# Altium PCB PCB_Микроконтроллер_2_2024-08-19.pcbdoc
Units mil, origin at the board's own origin, x right, y up, seen from the top; angles counter-clockwise.
Board outline 3343.13 x 2610 mil, 2 copper layers (Top Layer, Bottom Layer); 19 components, 17 nets, 81 pads, 8 vias.
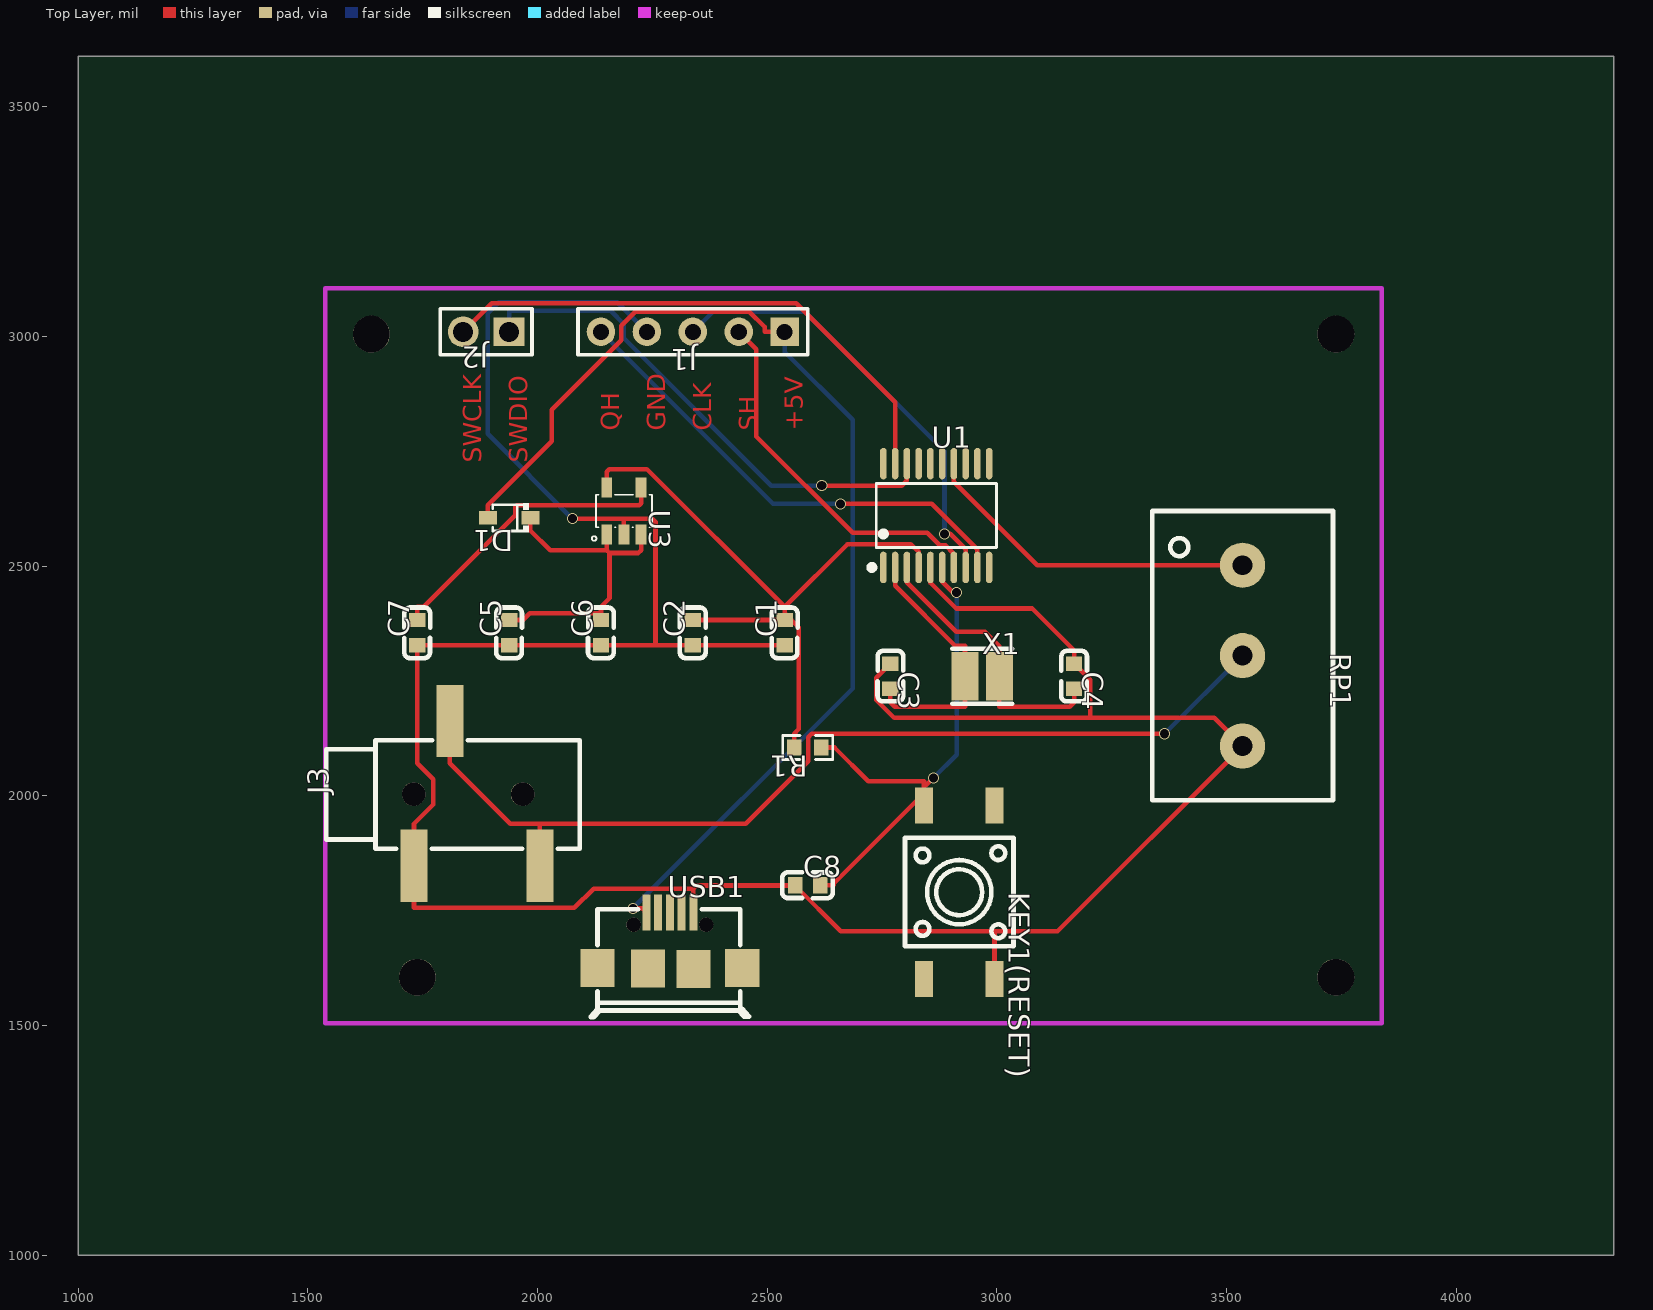
[diagram p0: Top Layer view]
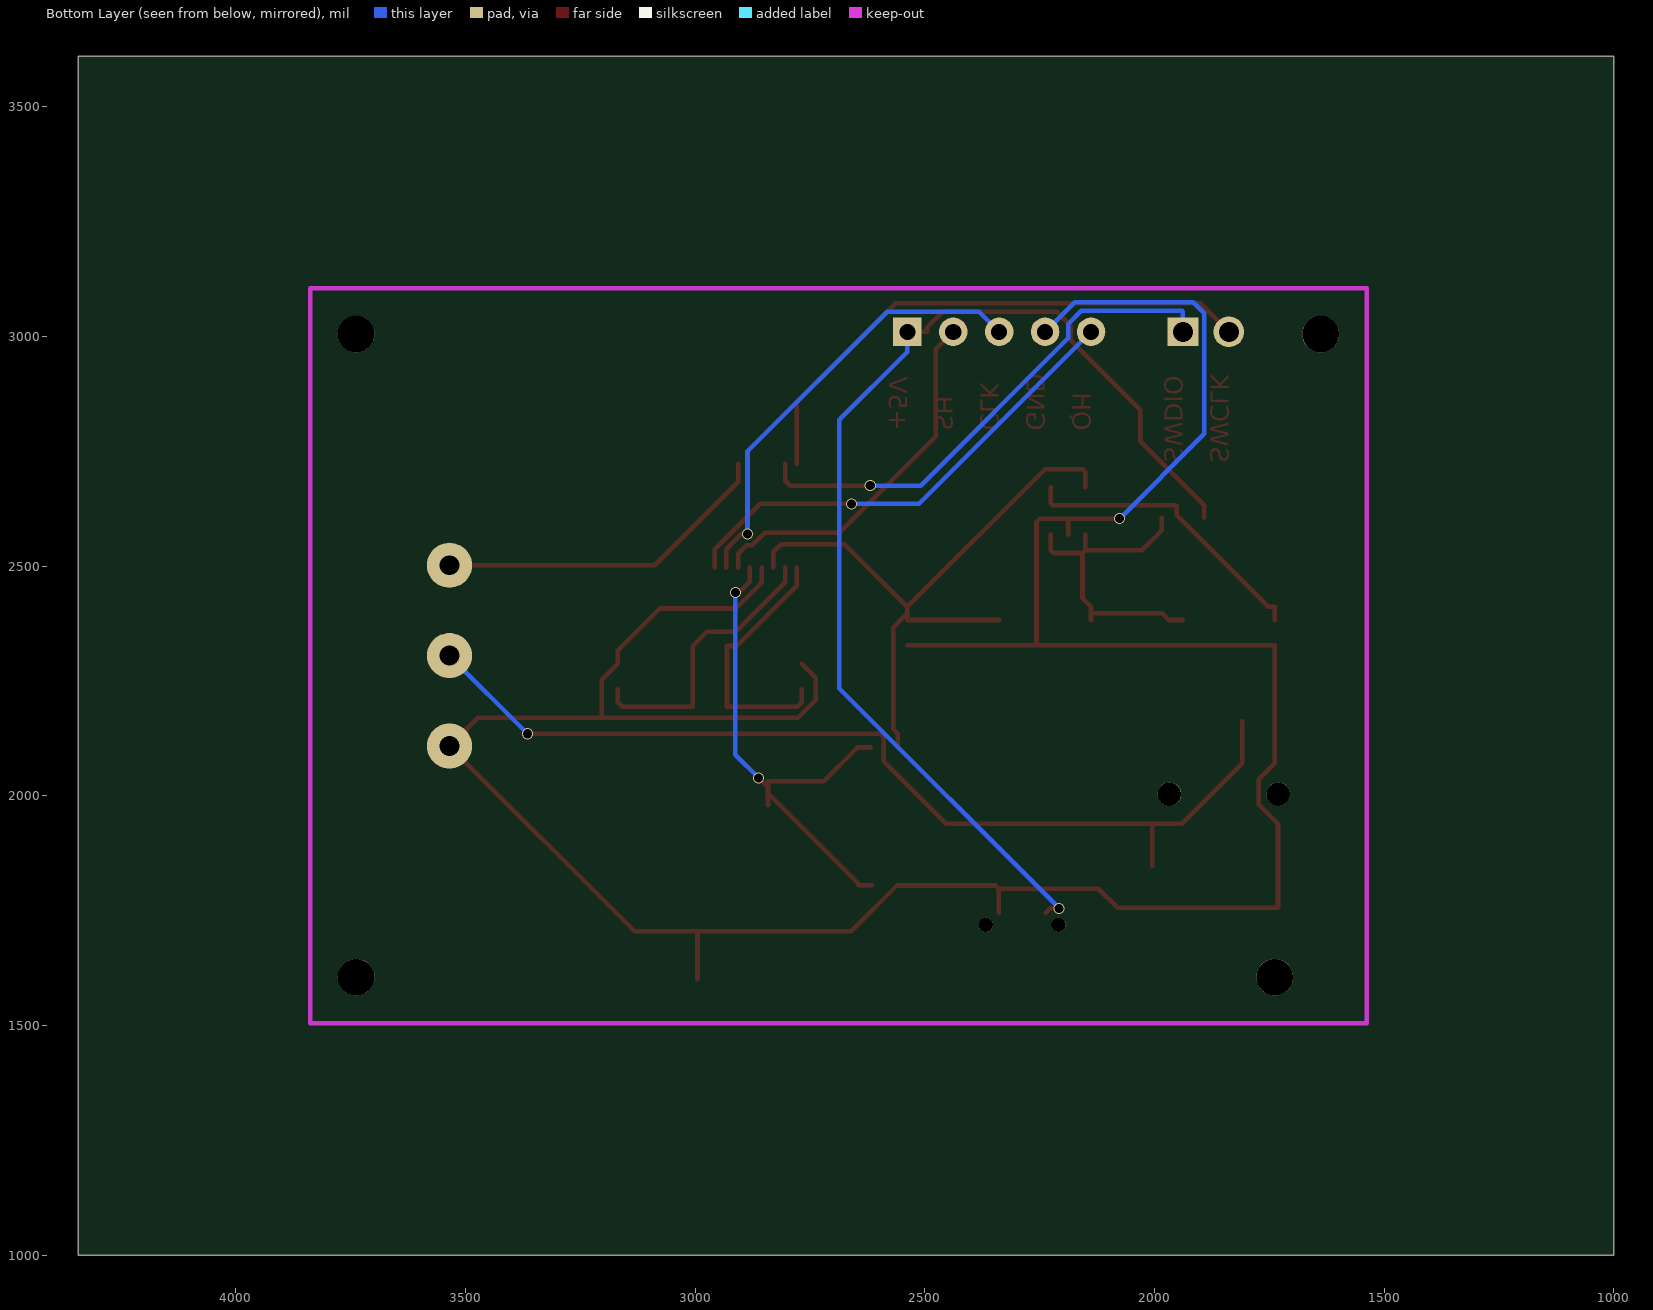
[diagram p1: Bottom Layer view, seen from below]

## Layer stack, top to bottom
Top Layer: signal copper (thickness not stored)
Dielectric: dielectric 12.6, FR-4, Dk 4.8
Bottom Layer: signal copper (thickness not stored)

## Board outline
4343.13,1000 1000,1000 1000,3610 4343.13,3610

## Components (designator, comment, footprint, x,y, rotation, side; value= is the part's Value field where it differs from the comment)
C1 "1uF" C0603 2538.13,2355 r90 top
C2 "100nF" C0603 2338.13,2355 r90 top
C3 "10pF" C0603 2768.13,2260 r270 top
C4 "10pF" C0603 3168.13,2260 r270 top
C5 "1uF" C0603 1938.13,2355 r90 top
C6 "100nF" C0603 2138.13,2355 r90 top
C7 "10nF" C0603 1738.13,2355 r90 top
C8 "0.1u" C0603 2588.13,1805 r0 top
D1 "BAT60JFILM" SOD-323_L1.8-W1.3-LS2.5-RD 1938.13,2605 r180 top
J1 "HDR-M-2.54_1x5" HDR-M-2.54_1X5 2338.13,3010 r180 top
J2 "HDR-M-2.54_1x2" HDR-M-2.54_1X2 1888.13,3010 r180 top
J3 "320B/PJ-001 3.5Jacks" AUDIO-SMD_C3792 1868.13,2005 r90 top
KEY1(RESET) "K4-6×6_SMD" KEY-SMD_4P-L6.0-W6.0-P3.90-LS10.0 2918.13,1790 r270 top
R1 "100k" R0603 2588.13,2105 r180 top
RP1 "POTRES COPY COPY" ПОТЕНЦИОМЕТР 3338.13,1990 r270 top
U1 "STM32G030F6P6" TSSOP-20_L6.5-W4.4-P0.65-LS6.4-BL 2868.13,2610 r0 top
U3 "LD3985M33R" SOT-23-5_L3.0-W1.7-P0.95-LS2.8-BR 2188.13,2620 r270 top
USB1 "MICRO USB B" "GENERIC MICRO USB / MICRO-USB-SMD_MICRO-USB-16" 2288.13,1685 r0 top
X1 "8MHz" OSC-SMD_2P-L3.2-W2.5 2968.13,2260 r0 top

## Footprints (in the part's own frame and the unit in brackets; to place one, negate y for a bottom-side part, rotate by r counter-clockwise, add the part's x,y. Pads: shape width x height; smd on the part's side, far side on the other; paste and mask are expansions set on the pad)
AUDIO-SMD_C3792 [mil]
  rect 157.48x59.05 smd paste+0 mask+2: 1(-157.5,137) 2(-157.5,-137) 3(157.5,59)
  round 51.18 hole 51.18 unplated paste+0: ""(-1.5,137.64) ""(-1.5,-99.37)
  silkscreen extent -121,-224 116,328
C0603 [mm]
  rect 0.8x0.9 smd paste+0 mask+0.051: 1(-0.7,0) 2(0.7,0)
  silkscreen extent -1.41,-0.71 1.39,0.72
"GENERIC MICRO USB / MICRO-USB-SMD_MICRO-USB-16" [mm]
  rect 0.45x2 smd paste+0 mask+0.051: 1(-1.301,1.535) 2(-0.65,1.535) 3(0,1.535) 4(0.65,1.535) 5(1.3,1.535)
  rect 1.9x2.1 smd paste+0 mask+0.051: 6(-4,-1.535) 6(-1.21,-1.55) 6(1.31,-1.57) 6(4,-1.535)
  round 0.8 hole 0.8 unplated paste+0: ""(-2,0.864) ""(2,0.864)
  silkscreen extent -4.37,-4.26 4.38,1.72
HDR-M-2.54_1X2 [mm]
  rect 1.7x1.575 hole 1.1 paste+0 mask+0.051: 1(-1.27,0)
  round 1.7 hole 1.1 paste+0 mask+0.051: 2(1.27,0)
  silkscreen extent -2.54,-1.27 2.54,1.27
HDR-M-2.54_1X5 [mil]
  rect 62x62 hole 35 paste+0 mask+2: 1(-200,0)
  round 62 hole 35 paste+0 mask+2: 2(-100,0) 3(0,0) 4(100,0) 5(200,0)
  silkscreen extent -250,-50 250,50
KEY-SMD_4P-L6.0-W6.0-P3.90-LS10.0 [mm]
  rect 2x1 smd paste+0 mask+0.051: 1(-4.8,1.95) 2(4.8,1.95) 3(-4.8,-1.95) 4(4.8,-1.95)
  silkscreen extent -3,-3 3,3
OSC-SMD_2P-L3.2-W2.5 [mm]
  rect 1.5x2.7 smd paste+0 mask+0.051: 1(0.95,0) 2(-0.95,0)
  silkscreen extent -1.65,-1.52 1.65,1.52
R0603 [mil]
  rect 31.75x34.02 smd paste-3937.01 mask+2: 1(-29.66,0) 2(29.65,0)
  silkscreen extent -55,-26 55,26
SOD-323_L1.8-W1.3-LS2.5-RD [mm]
  rect 1x0.75 smd paste+0 mask+0.051: 1(-1.173,0) 2(1.173,0)
  silkscreen extent -1.08,-0.8 0.9,0.8
SOT-23-5_L3.0-W1.7-P0.95-LS2.8-BR [mm]
  rect 1.1x0.6 smd paste+0 mask+0.051: 1(1.3,-0.95) 2(1.3,0) 3(1.3,0.95) 4(-1.3,0.95) 5(-1.3,-0.95)
  silkscreen extent -0.9,-1.78 1.65,1.55
TSSOP-20_L6.5-W4.4-P0.65-LS6.4-BL [mm]
  oval 0.364x1.742 smd paste+0 mask+0.051: 1(-2.925,-2.871) 2(-2.275,-2.871) 3(-1.625,-2.871) 4(-0.975,-2.871) 5(-0.325,-2.871) 6(0.325,-2.871) 7(0.975,-2.871) 8(1.625,-2.871) 9(2.275,-2.871) 10(2.925,-2.871) 11(2.925,2.871) 12(2.275,2.871) 13(1.625,2.871) 14(0.975,2.871) 15(0.325,2.871) 16(-0.325,2.871) 17(-0.975,2.871) 18(-1.625,2.871) 19(-2.275,2.871) 20(-2.925,2.871)
  silkscreen extent -3.71,-3.02 3.33,1.77
ПОТЕНЦИОМЕТР [mm]
  round 2.5 hole 1.1 paste+0 mask+0.051: 1(-13,4.999) 2(-8.001,4.999) 3(-3,4.999)
  silkscreen extent -16,0 0,10

## Free pads (board coordinates)
  round 80 hole 80 unplated paste+0: ""(1638.13,3005) ""(1738.13,1605) ""(3738.13,1605) ""(3738.13,3005)

## Via types
v1: diameter 24.02, hole 19.69, Top Layer to Bottom Layer, tented both sides, 8 vias

## Nets (pads, with @x,y where several pads share a name; then routed paths per layer and width w, separated by ;. In a path a pad name is that pad's centre, name@x,y a point inside that pad or via, vN(x,y) a via of type N, cw(c..) or ccw(c..) an arc to the next point about the centre after c; other vN are vias at no path point)
+3V3: C1.2 C2.2 R1.2 U1.4 U3.5 | length 1475
  Top Layer w10: U3.5 2150.73,2705.73 2156.13,2711.13 2238.2,2711.13 2538.13,2411.2 ; C2.2 C1.2 C1.2@2538.13,2396.88 ; R1.2 2558.47,2134.9 2568.79,2145.22 2568.79,2366.22 C1.2@2538.13,2396.88 ; U1.4 2829.74,2530.85 2812.8,2547.79 2674.72,2547.79 2538.13,2411.2 ; C1.2@2538.13,2396.88 2538.13,2411.2
+5V: D1.2 J1.1 USB1.1 | length 2479.4
  Top Layer w10: D1.2 1891.97,2632.65 2030.89,2771.57 2030.89,2840.61 2182.07,2991.79 2182.07,3022.84 2213.16,3053.93 2461.28,3053.93 2494.24,3020.97 2494.24,3010 J1.1 ; v1(2207.4,1754.95) 2227.4,1754.95 USB1.1
  Bottom Layer w10: v1(2207.4,1754.95) 2685.85,2233.4 2685.85,2818.39 2538.13,2966.11 J1.1
CLK: J1.3 U1.8 | length 971.3
  Top Layer w10: v1(2885.92,2570.26) 2898.49,2570.26 2932.11,2536.64 U1.8
  Bottom Layer w10: J1.3 2382.07,3053.94 2581.84,3053.94 2885.92,2749.86 v1(2885.92,2570.26)
GND: C1.1 C2.1 C3.1 C4.1 C5.1 C6.1 C7.1 C8.1 J1.4 J3.1 KEY1(RESET).2 RP1.3 U1.5 U3.2 USB1.5 | length 6484.9
  Top Layer w10: v1(2075.98,2603.41) 2188.08,2603.41 2188.13,2603.36 ; U3.2 2188.13,2598.91 2188.13,2603.36 ; USB1.5 2339.32,1793.25 2339.32,1797.7 ; C1.1 C2.1 2256.81,2327.44 ; C8.1 C8.1@2560.57,1804.47 ; C3.1 2737.47,2256.9 2737.47,2208.47 2776.18,2169.76 3203.26,2169.76 ; U1.5 2855.34,2464.1 2911.91,2407.53 3076.8,2407.53 3168.13,2316.2 C4.1 3203.26,2252.43 3203.26,2169.76 ; 2994.91,1601.03 2994.91,1653.29 2994.91,1705.28 ; 2188.13,2603.36 2188.18,2603.41 2250.09,2603.41 2256.81,2596.69 2256.81,2327.44 ; 2256.81,2327.44 C6.1 C5.1 C7.1 1738.13,2070.56 1772.79,2035.9 1772.79,1980.79 1731.13,1939.13 J3.1 1731.13,1755.87 1731.18,1755.82 2080.31,1755.82 2122.24,1797.75 2339.27,1797.75 2339.32,1797.7 ; 2339.32,1797.7 2346.09,1804.47 C8.1@2560.57,1804.47 ; C8.1@2560.57,1804.47 2659.76,1705.28 2994.91,1705.28 ; 2994.91,1705.28 3132.11,1705.28 RP1.3 3473.27,2169.76 3203.26,2169.76
  Bottom Layer w10: v1(2075.98,2603.41) 1891.73,2787.66 1891.73,3050.53 1915.79,3074.59 2173.54,3074.59 J1.4
J3_2: J3.2 J3.3 RP1.2 | length 2145.8
  Top Layer w10: J3.3 1809.13,2070.87 1940.87,1939.13 2005.13,1939.13 ; J3.2 2005.13,1939.13 ; v1(3364.88,2134.95) 2596.56,2134.95 2588.97,2127.36 2588.97,2075.05 2453.05,1939.13 2005.13,1939.13
  Bottom Layer w10: v1(3364.88,2134.95) RP1.2
QH: J1.5 U1.9 | length 1055.2
  Top Layer w10: v1(2659.51,2635.59) 2858.53,2635.59 2957.7,2536.42 U1.9
  Bottom Layer w10: J1.5 2512.54,2635.59 v1(2659.51,2635.59)
S$6: 
S$19: 
SH/LD#: J1.2 U1.7 | length 809.6
  Top Layer w10: J1.2 2476.3,2971.83 2476.3,2782.11 2685.93,2572.48 2848.44,2572.48 2875.6,2545.32 2888.14,2545.32 2906.52,2526.94 U1.7
SWCLK: J2.2 U1.19 | length 1188.9
  Top Layer w10: J2.2 1900.02,3071.89 2563.43,3071.89 2778.56,2856.76 U1.19
SWDIO: J2.1 U1.18 | length 1128.1
  Top Layer w10: v1(2618.75,2674.92) 2793.05,2674.92 2804.15,2686.02 U1.18
  Bottom Layer w10: J2.1 1938.13,3053.89 1939.79,3055.55 2159.42,3055.55 2188.13,3026.84 2188.13,2995.74 2508.95,2674.92 v1(2618.75,2674.92)
U1_2: C3.2 U1.2 X1.2 | length 573.8
  Top Layer w10: C3.2 2768.13,2203.8 2777.97,2193.96 2930.73,2193.96 2930.73,2226.98 X1.2 2930.73,2326.04 2909.52,2326.04 2778.56,2457 U1.2
U1_3: C4.2 U1.3 X1.1 | length 618.5
  Top Layer w10: U1.3 2804.15,2464.69 2911.46,2357.38 2974.19,2357.38 3005.53,2326.04 X1.1 3005.53,2226.98 3005.53,2193.96 3158.29,2193.96 3168.13,2203.8 C4.2
U1_6: C8.2 KEY1(RESET).3 R1.1 U1.6 | length 1142.4
  Top Layer w10: C8.2 2644.33,1805 2644.33,1808.08 2841.36,2005.11 ; R1.1 2646.55,2105 2720.31,2031.24 2841.36,2031.24 2841.36,2018.18 ; 2841.36,1978.98 2841.36,2005.11 ; v1(2862.13,2038.95) 2841.36,2018.18 ; U1.6 2880.93,2466.24 2904.88,2442.29 v1(2912.41,2442.29) ; 2841.36,2005.11 2841.36,2018.18
  Bottom Layer w10: v1(2862.13,2038.95) 2912.41,2089.23 v1(2912.41,2442.29)
U1_14: RP1.1 U1.14 | length 743.2
  Top Layer w10: U1.14 2906.52,2683.45 3088.17,2501.8 RP1.1
U3_1: C5.2 C6.2 D1.1 U3.1 U3.3 | length 720.1
  Top Layer w10: C5.2 1968.74,2382.56 1983.06,2396.88 C6.2@2138.13,2396.88 ; D1.1 1984.29,2577.35 2027.37,2534.27 2150.73,2534.27 ; C6.2 C6.2@2138.13,2396.88 ; U3.1 2150.73,2534.27 ; U3.3 2225.53,2534.27 2219.67,2528.41 2156.59,2528.41 ; C6.2@2138.13,2396.88 2138.13,2411.2 2156.59,2429.66 2156.59,2528.41 ; 2150.73,2534.27 2156.59,2528.41
U3_4: C7.2 U3.4 | length 655.3
  Top Layer w10: C7.2 1738.13,2411.2 1752.45,2411.2 1951.67,2610.42 1951.67,2629.79 1954.58,2632.7 2221.59,2632.7 2225.53,2636.64 U3.4
pads on no net: J3. KEY1(RESET).1 KEY1(RESET).4 U1.1 U1.10 U1.11 U1.12 U1.13 U1.15 U1.16 U1.17 U1.20 USB1. USB1.2 USB1.3 USB1.4 USB1.6

## Other copper
Top Layer:
  text "QH" at 2177.82,2795 h39.37 r90
  text "GND" at 2277.82,2795 h39.37 r90
  text "CLK" at 2377.82,2795 h39.37 r90
  text "SH" at 2477.82,2795 h39.37 r90
  text "+5V" at 2577.82,2795 h39.37 r90
  text "SWCLK" at 1877.82,2725 h39.37 r90
  text "SWDIO" at 1977.82,2725 h39.37 r90